# Altium PCB PressurePulse_Pulse-PCB.PcbDoc
Units mm, origin at the board's own origin, x right, y up, seen from the top; angles counter-clockwise.
Board outline 152.4 x 101.6 mm, 4 copper layers (Top Layer, Layer 1, Layer 2, Bottom Layer), stack 1.592 mm thick; 108 components, 77 nets, 384 pads, 27 vias.
Unrouted connection lines stored in the file: 225.
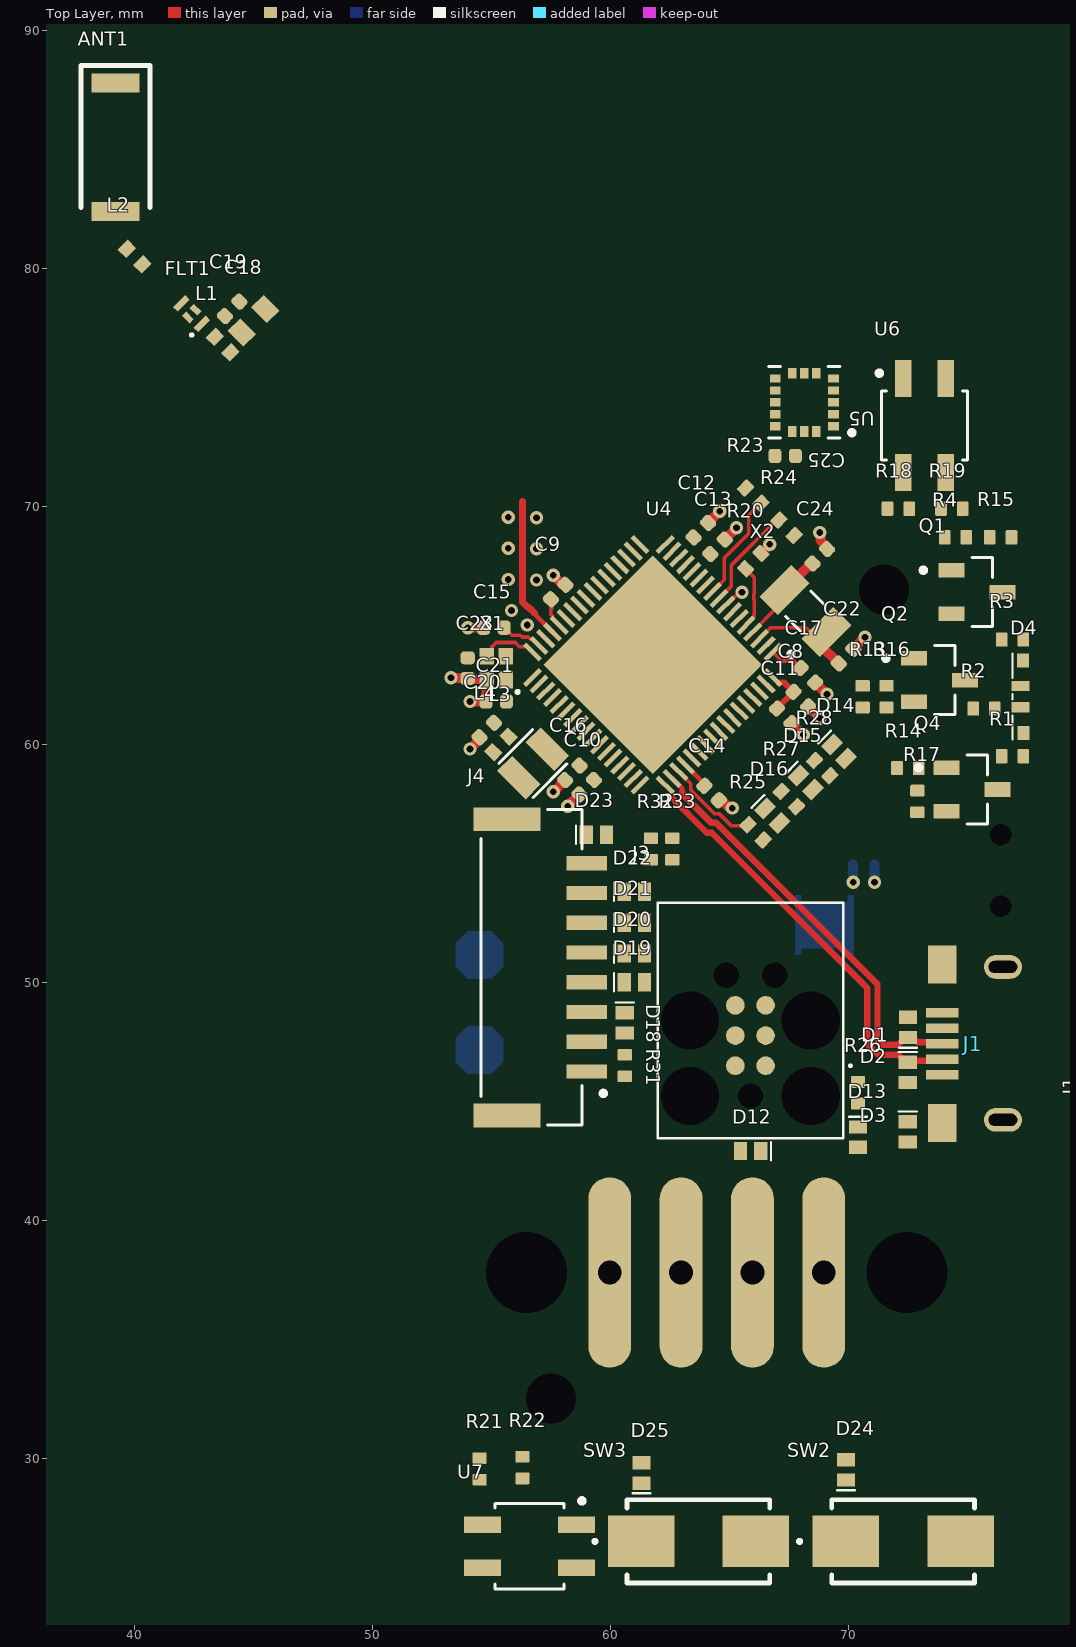
[diagram p0: Top Layer view]
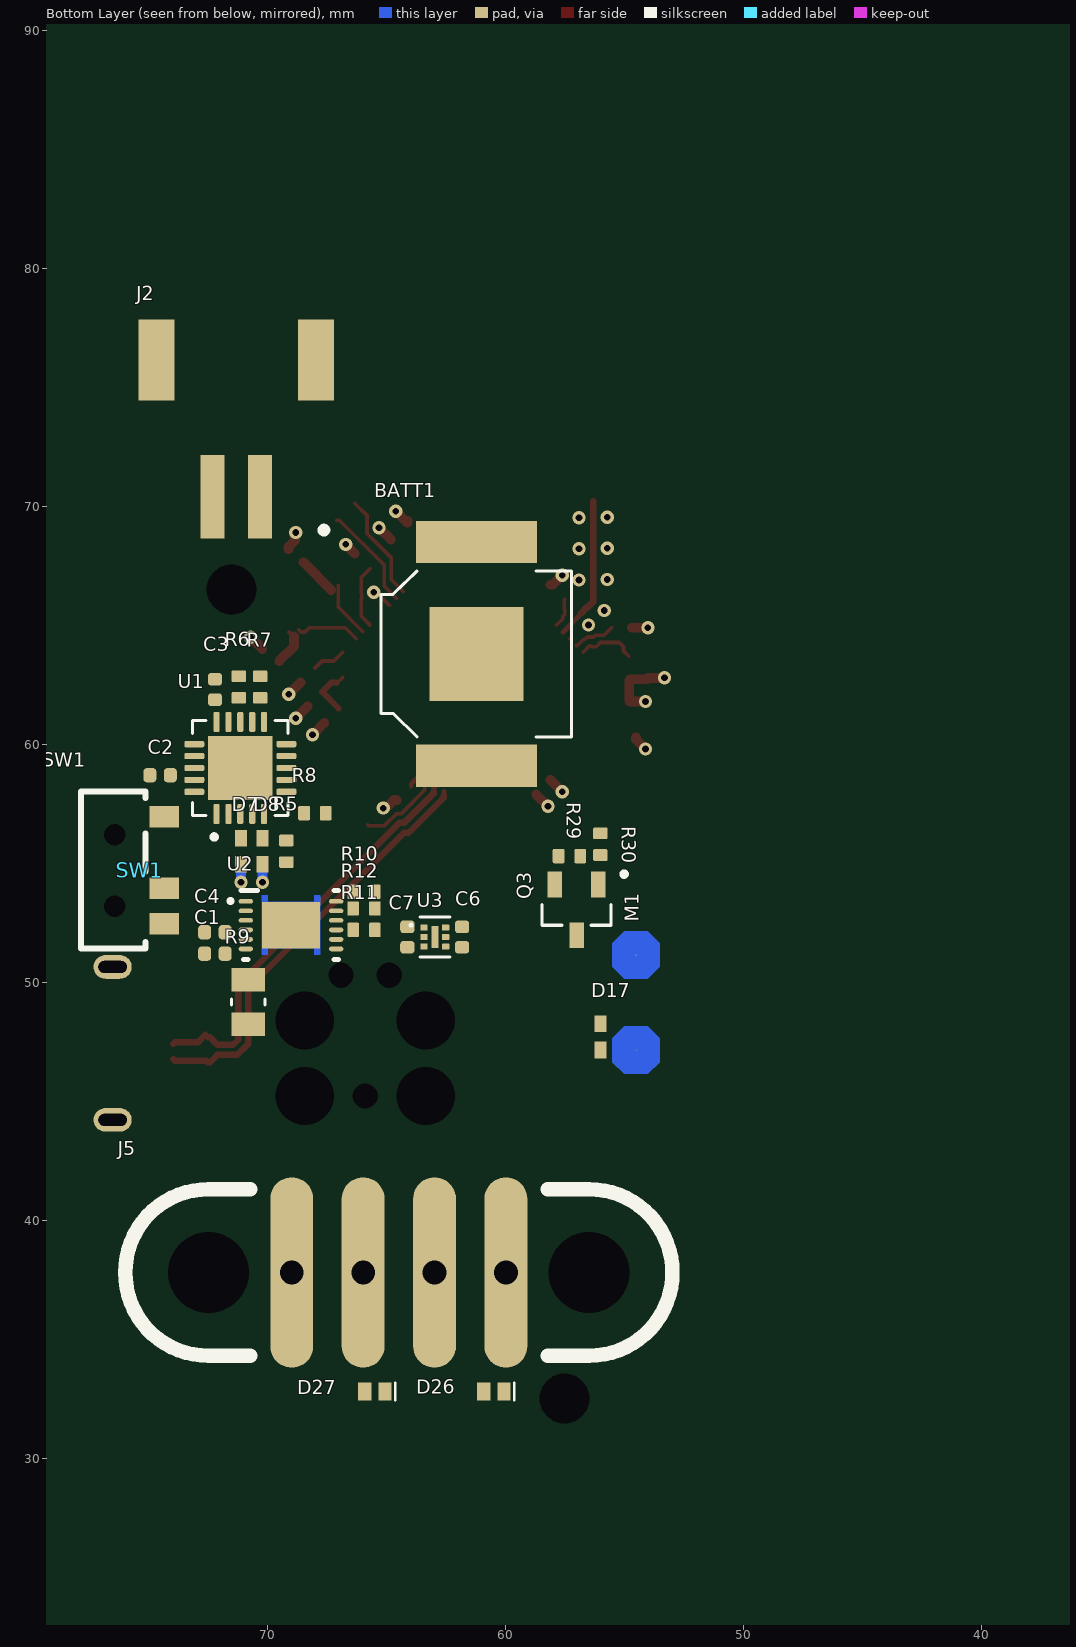
[diagram p1: Bottom Layer view, seen from below]

## Layer stack, top to bottom
Top Solder: solder mask 0.0102, Solder Resist, Dk 3.5
Top Layer: signal copper 0.0356
Dielectric 2: prepreg 0.2104, PP-006, Dk 4.4
Layer 1: signal copper 0.0175
Dielectric 1: dielectric 1.065, FR-4, Dk 4.6
Layer 2: signal copper 0.0175
Dielectric 3: prepreg 0.2104, PP-006, Dk 4.4
Bottom Layer: signal copper 0.0356
Bottom Solder: solder mask 0.0102, Solder Resist, Dk 3.5

## Board outline
0,0 152.4,0 152.4,101.6 0,101.6

## Design rules (kind name [scope] priority, off if disabled: settings)
Clearance "Power Plane - 1" [InNet('VDD') vs InNet('VBATT')] p1: gap=0.508 ignorepadtopadclearanceinfootprint=TRUE
Clearance "Power Plane - 2" [InNet('VDD') vs InNet('+5')] p2: gap=0.508 ignorepadtopadclearanceinfootprint=TRUE
Clearance [All] p3: gap=0.152 ignorepadtopadclearanceinfootprint=TRUE except(0: Arc-Hole Track-Hole SMDPad-Hole THPad-Hole Via-Hole Fill-Hole Poly-Hole Region-Hole Text-Hole)
DiffPairsRouting [InDifferentialPair('USB_D')] p1: maxlimit=0.152 minlimit=0.127 mostfreqgap=0.152 toplayer_mingap=0.152 toplayer_minwidth=0.203 toplayer_maxwidth=0.271 toplayer_prefwidth=0.271 midlayer1_maxgap=0.127 midlayer1_prefgap=0.127 midlayer1_minwidth=0.148 midlayer1_maxwidth=0.148 midlayer1_prefwidth=0.148 midlayer2_maxgap=0.127 midlayer2_prefgap=0.127 midlayer2_minwidth=0.148 midlayer2_maxwidth=0.148 midlayer2_prefwidth=0.148 bottomlayer_mingap=0.152 bottomlayer_minwidth=0.203 bottomlayer_maxwidth=0.271 bottomlayer_prefwidth=0.271 impedanceprofiledriven=TRUE impedanceprofileid={EF4C8564-DD1B-4EB1-A0A0-FBC0820FF4A4} impedanceprofilevalue=90.000000 maxuncoupledlength=12.7
Height [All] p1: minheight=0 maxheight=30 prefheight=12.7
HoleSize [All] p1: absolutevalues=TRUE maxlimit=3.5 minlimit=0.152 maxpercent=80.000 minpercent=20.000
MinimumSolderMaskSliver [All] p1: minsoldermaskwidth=0.025
PolygonConnect [All] p1: connectstyle=Direct reliefconductorwidth=0.254 reliefentries=4 polygonreliefangle="90 Angle" airgapwidth=0.254
RoomDefinition U_IR-Detector [InComponentClass('U_IR-Detector')] p1: confinementstyle=ConfineIn formatcopy=TRUE lockcomponents=FALSE outline 153.846,8.466 153.846,15.044 159.271,15.044 159.271,15.084 166.529,15.084 166.529,12.626 158.529,12.626 158.529,8.466
RoomDefinition U_MCU-BLE [InComponentClass('U_MCU-BLE')] p2: confinementstyle=ConfineIn formatcopy=TRUE lockcomponents=FALSE outline -25.4,-25.4 25.4,-25.4 25.4,0 -25.4,0
RoomDefinition U_USB-Charger-BMS [InComponentClass('U_USB-Charger-BMS')] p3: confinementstyle=ConfineIn formatcopy=TRUE lockcomponents=FALSE outline 85.367,63.575 85.367,65.233 86.847,65.233 86.847,69.188 88.067,69.188 88.067,70.933 93.34,70.933 93.34,71.235 102.252,71.235 102.252,61.193 103.615,61.193 103.615,53.485 97.107,53.485 97.107,61.323 93.34,61.323 93.34,61.575 86.967,61.575 86.967,62.95 86.847,62.95 86.847,63.575
RoomDefinition U_SWD [InComponentClass('U_SWD')] p4: confinementstyle=ConfineIn formatcopy=TRUE lockcomponents=FALSE outline 59.98,42.139 59.98,54.647 70.388,54.647 70.388,50.286 88.916,50.286 88.916,50.229 102.129,50.229 102.129,47.329 103.029,47.329 103.029,45.671 70.388,45.671 70.388,42.139
RoomDefinition U_USB [InComponentClass('U_USB')] p5: confinementstyle=ConfineIn formatcopy=TRUE lockcomponents=FALSE outline 71.81,42.7 71.81,49.232 72.967,49.232 72.967,51.901 79.2,51.901 79.2,42.935 73.182,42.935 73.182,42.7
RoomDefinition U_RF_T-Line [InComponentClass('U_RF_T-Line')] p6: confinementstyle=ConfineIn formatcopy=TRUE lockcomponents=FALSE outline 37.371,81.296 37.371,88.904 41.029,88.904 41.029,82.012 41.512,82.012 41.512,79.631 45.431,79.631 45.431,79.395 46.595,79.395 46.595,76.205 45.212,76.205 45.212,75.288 42.188,75.288 42.188,76.618 40.918,76.618 40.918,78.988 38.488,78.988 38.488,81.296
RoomDefinition U_Buttons [InComponentClass('U_Buttons')] p7: confinementstyle=ConfineIn formatcopy=TRUE lockcomponents=FALSE outline 153.446,1.414 153.446,2.786 159.916,2.786 159.916,1.414
RoomDefinition U_Fuel-Gauge [InComponentClass('U_Fuel-Gauge')] p8: confinementstyle=ConfineIn formatcopy=TRUE lockcomponents=FALSE outline 77.641,59.471 77.641,61.129 80.099,61.129 80.099,60.504 85.029,60.504 85.029,59.154 86.399,59.154 86.399,56.746 84.034,56.746 84.034,54.961 80.106,54.961 80.106,56.896 79.565,56.896 79.565,57.671 77.641,57.671 77.641,59.471
RoomDefinition U_LDO [InComponentClass('U_LDO')] p9: confinementstyle=ConfineIn formatcopy=TRUE lockcomponents=FALSE outline 94.646,75.841 94.646,78.099 95.386,78.099 95.386,78.129 97.899,78.129 97.899,78.099 98.454,78.099 98.454,75.841 97.899,75.841 97.899,75.811 95.386,75.811 95.386,75.841
RoomDefinition U_TFT-Display [InComponentClass('U_TFT-Display')] p10: confinementstyle=ConfineIn formatcopy=TRUE lockcomponents=FALSE outline 46.646,85.614 46.646,86.986 61.716,86.986 61.716,86.929 82.529,86.929 82.529,85.271 72.684,85.271 72.684,82.171 71.184,82.171 71.184,79.671 70.971,79.671 70.971,77.814 60.529,77.814 60.529,43.346 53.721,43.346 53.721,85.614
RoomDefinition U_UI-LEDs [InComponentClass('U_UI-LEDs')] p11: confinementstyle=ConfineIn formatcopy=TRUE lockcomponents=FALSE outline 93.526,127.621 93.526,130.079 104.626,130.079 104.626,130.179 138.334,130.179 138.334,128.521 126.834,128.521 126.834,128.171 122.099,128.171 122.099,120.821 113.684,120.821 113.684,117.171 106.926,117.171 106.926,123.421 100.027,123.421 100.027,127.621
RoomDefinition U_Gyroscope [InComponentClass('U_Gyroscope')] p12: confinementstyle=ConfineIn formatcopy=TRUE lockcomponents=FALSE outline 75.3,77.8 75.3,73.742 73.175,73.742 73.175,72.767 70.917,72.767 70.917,73.742 70.817,73.742 70.817,77.8
RoomDefinition U_Vibration-Motor [InComponentClass('U_Vibration-Motor')] p13: confinementstyle=ConfineIn formatcopy=TRUE lockcomponents=FALSE outline 23.246,44.891 23.246,53.399 54.546,53.399 54.546,55.189 55.171,55.189 55.171,57.274 56.829,57.274 56.829,56.374 58.729,56.374 58.729,55.189 58.979,55.189 58.979,50.901 57.154,50.901 57.154,46.296 55.804,46.296 55.804,44.891
RoomDefinition U_Magnetic-Charger [InComponentClass('U_Magnetic-Charger')] p14: confinementstyle=ConfineIn formatcopy=TRUE lockcomponents=FALSE outline 52.409,33.346 52.409,42.254 76.527,42.254 76.527,33.346 66.484,33.346 66.484,32.114 59.314,32.114 59.314,33.346
RoutingVias [All] p1: holewidth=0.279 width=0.559 viastyle="Through Hole" minholewidth=0.203 minwidth=0.406 maxholewidth=0.711 maxwidth=1.27
SilkToSolderMaskClearance [IsPad] p1: minsilkscreentomaskgap=0.061 clearancetoexposedcopper=TRUE
SolderMaskExpansion SolderMaskExpansion_1 [IsVia] p1: expansion=0.102 istentingtop=TRUE
SolderMaskExpansion [All] p2: expansion=0.102 istentingtop=FALSE
UnRoutedNet [All] p1: checkbadconnections=TRUE
Width RF_CPWG [InNetClass('RF')] p1: maxlimit=0.286 minlimit=0.175 preferedwidth=0.286 toplayer_minwidth=0.203 midlayer1_maxwidth=0.175 midlayer1_prefwidth=0.175 midlayer2_maxwidth=0.175 midlayer2_prefwidth=0.175 bottomlayer_minwidth=0.203 impedanceprofiledriven=TRUE impedanceprofileid={2461F056-BD51-4085-9126-9224849B1B2E} impedanceprofilevalue=50.000000 minimp=50.000000 maximp=50.000000 favimp=50.000000
Width [All] p2: maxlimit=1.524 minlimit=0.152 preferedwidth=0.914 toplayer_maxwidth=1.27 toplayer_prefwidth=0.406 bottomlayer_maxwidth=1.27 bottomlayer_prefwidth=0.406 minimp=50.000000 maximp=50.000000 favimp=50.000000
24 further rules are at their usual default settings.

## Classes and differential pairs
component class U_IR-Detector: R18 R19 R21 R22 U6 U7
component class U_UI-LEDs: D4 Q1 Q2 Q4 R1 R2 R3 R4 R13 R14 R15 R16 R17
component class U_RF_T-Line: ANT1 C18 C19 FLT1 L1 L2
net class USB: USB_D_N USB_D_P
net class RF: NetANT1_1 NetC18_2 NetC19_2 NetFLT1_3
component class U_Vibration-Motor: D17 M1 Q3 R29 R30
component class U_USB: D1 D2 D3 J1
component class U_USB-Charger-BMS: C2 C3 D7 D8 J2 R5 R6 R7 R8 SW1 U1
component class U_TFT-Display: D18 D19 D20 D21 D22 D23 J4 R31 R32 R33
component class U_SWD: D12 D13 D14 D15 D16 J3 R25 R26 R27 R28
component class U_MCU-BLE: BATT1 C8 C9 C10 C11 C12 C13 C14 C15 C16 C17 C20 C21 C22 C23 C24 L3 L4 R20 R23 R24 U4 X1 X2
component class U_Magnetic-Charger: D26 D27 J5
component class U_LDO: C6 C7 U3
component class U_Gyroscope: C25 U5
component class U_Fuel-Gauge: C1 C4 R9 R10 R11 R12 U2
component class U_Buttons: D24 D25 SW2 SW3
differential pair USB_D: +USB_D_P -USB_D_N

## Components (designator, comment, footprint, x,y, rotation, side; value= is the part's Value field where it differs from the comment)
ANT1 "CHIP ANTENNA" ANTC5220X130N 39.2,85.1 r90 top value=DNS
BATT1 "2998TR" SR66 61.2,63.8 r90 bottom value=DNS
C1 "CAP" 0402C 72.2,51.2 r180 bottom value=4.7uF
C2 "CAP" 0402C 74.5,58.7 r180 bottom value=10uF
C3 "CAP" 0402C 72.196,62.304 r270 bottom value=4.7u
C4 "CAP" 0402C 72.2,52.1 r180 bottom value=1uF
C6 "CAP" 0402C 61.81,51.9 r90 bottom value=4.7uF
C7 "CAP" 0402C 64.11,51.9 r90 bottom value=4.7uF
C8 "CAP" 0402C 68,61.9 r135 top value=4.7uF
C9 "CAP" 0402C 57.8,66.4 r225 top value=100nF
C10 "CAP" 0402C 59,58.2 r45 top value=100nF
C11 "CAP" 0402C 67.3,61.2 r135 top value=100nF
C12 "CAP" 0402C 63.8,69 r225 top value=1uF
C13 "CAP" 0402C 64.5,68.3 r225 top value=1uF
C14 "CAP" 0402C 64.25,57.95 r135 top value=100nF
C15 "CAP" 0402C 55.1,64.9 r0 top value=100nF
C16 "CAP" 0402C 58.4,58.8 r45 top value=4.7uF
C17 "CAP" 0402C 68.3,62.9 r135 top value=100nF
C18 "CAP" 0603C 45,77.8 r225 top value=0.8pF
C19 "CAP" 0402C 44.1,78.3 r225 top value=0.3pF
C20 "CAP" 0402C 54.8,60.6 r45 top value=4.7uF
C21 "CAP" 0402C 55.2,61.8 r180 top value=DNS
C22 "CAP" 0402C 69.9,63.7 r45 top value=10pF
C23 "CAP" 0402C 54,63.2 r270 top value=DNS
C24 "CAP" 0402C 68.8,67.9 r45 top value=10pF
C25 "CAP" 0402C 67.346,72.121 r0 top value=4.7uF
D1 "RCLAMP0521P.TCT" BDFN2C051V40 72.5,48.1 r90 top value=BDFN2C051V40
D2 "RCLAMP0521P.TCT" BDFN2C051V40 72.496,46.216 r270 top value=BDFN2C051V40
D3 "RCLAMP0521P.TCT" BDFN2C051V40 72.496,43.716 r270 top value=BDFN2C051V40
D4 "LED - RGB, SIDE MOUNT" FM-3510RGBA-SG 77.3,62 r90 top value=FM-3510RGBA-SG
D7 "490mV @ 500mA" SOD-523 71.096,55.504 r270 bottom value=MSK4005
D8 "490mV @ 500mA" SOD-523 70.196,55.504 r270 bottom value=MSK4005
D12 "RCLAMP0521P.TCT" BDFN2C051V40 65.9,42.9 r180 top value=BDFN2C051V40
D13 "RCLAMP0521P.TCT" BDFN2C051V40 70.4,43.5 r270 top value=BDFN2C051V40
D14 "RCLAMP0521P.TCT" BDFN2C051V40 69.6,59.7 r315 top value=BDFN2C051V40
D15 "RCLAMP0521P.TCT" BDFN2C051V40 68.2,58.4 r315 top value=BDFN2C051V40
D16 "RCLAMP0521P.TCT" BDFN2C051V40 66.8,57 r315 top value=BDFN2C051V40
D17 "490mV @ 500mA" SOD-523 56,47.7 r90 bottom value=MSK4005
D18 "BDFN2C051V40" BDFN2C051V40 60.6,48.3 r270 top
D19 "BDFN2C051V40" BDFN2C051V40 61,50 r0 top
D20 "BDFN2C051V40" BDFN2C051V40 61,51.2 r0 top
D21 "BDFN2C051V40" BDFN2C051V40 61,52.5 r0 top
D22 "BDFN2C051V40" BDFN2C051V40 61,53.8 r0 top
D23 "BDFN2C051V40" BDFN2C051V40 59.4,56.2 r0 top
D24 "BDFN2C051V40" BDFN2C051V40 69.9,29.5 r90 top
D25 "BDFN2C051V40" BDFN2C051V40 61.3,29.368 r90 top
D26 "RCLAMP0521P.TCT" BDFN2C051V40 60.468,32.8 r0 bottom value=BDFN2C051V40
D27 "RCLAMP0521P.TCT" BDFN2C051V40 65.468,32.8 r0 bottom value=BDFN2C051V40
FLT1 "DLF162500LT-5028A1" DLF-4_1P6X0P8 42.4,78.1 r135 top
J1 "UJ2-MIBH2-4-SMT-TR" "USB MICRO JLC" 73.946,47.418 r90 top value=UA0507065250-037-06
J2 "S2B-PH-SM4-TB" JST_PH-2POS-SMT-RA 71.3,73.275 r0 bottom value=S2B-PH-SM4-TB(TF)(SN)
J3 "2030-IDC" "TAG CONNECT TC2030IDC - NO 3D MODEL" 65.884,47.443 r90 top value=DNS
J4 "BM08B-GHS-TBT(LF)(SN)" JST_BM08B-GHS-TBT(LF)(SN)(N) 59,50.625 r270 top
J5 "303C-xxxxxx-30-04" "MAG POGO - 4 POS MALE" 64.468,37.8 r180 bottom value=DNS
L1 "IND" 0402L 43.7,76.8 r135 top value=2.7nH
L2 "IND" 0402L 40,80.5 r315 top
L3 "IND" 0805L 56.75,59.2 r45 top value=10uH
L4 "IND" 0402L 55.4,60 r225 top value=10nH
M1 "VIBRATION MOTOR" "BARE PADS - 2" 55.5,49.145 r0 bottom value=LCM0827A3038F
Q1 "NMOS" SOT-23 75.4,66.4 r0 top value=IRLML0100TRPBF
Q2 "NMOS" SOT-23 73.83,62.7 r0 top value=IRLML0100TRPBF
Q3 "NMOS" SOT-23 57,53.045 r270 bottom value=IRLML0100TRPBF
Q4 "NMOS" SOT-23 75.2,58.1 r0 top value=IRLML0100TRPBF
R1 "RES" 0402R 76.9,59.5 r0 top value=30
R2 "RES" 0402R 75.7,61.5 r0 top value=30
R3 "RES" 0402R 76.9,64.4 r0 top value=60
R4 "RES" 0402R 74.5,68.7 r180 top value=47
R5 "RES" 0402R 69.196,55.504 r90 bottom value=10k
R6 "RES" 0402R 71.196,62.404 r270 bottom value=2.5k
R7 "RES" 0402R 70.296,62.404 r270 bottom value=22k
R8 "RES" 0402R 67.996,57.104 r0 bottom value=15k
R9 "RES" 0805R 70.8,49.165 r270 bottom value=10m
R10 "RES" 0402R 65.93,53.8 r180 bottom value=10k
R11 "RES" 0402R 65.93,52.2 r180 bottom value=DNS
R12 "RES" 0402R 65.93,53.1 r0 bottom value=10k
R13 "RES" 0402R 70.6,62 r270 top value=47
R14 "RES" 0402R 72.5,59 r180 top value=47
R15 "RES" 0402R 76.4,68.7 r180 top value=10k
R16 "RES" 0402R 71.6,62 r90 top value=10k
R17 "RES" 0402R 72.9,57.6 r90 top value=10k
R18 "RES" 0402R 72.1,69.9 r180 top value=100
R19 "RES" 0402R 74.345,69.9 r0 top value=10k
R20 "RES" 0402R 66,67.7 r225 top value=10k
R21 "RES" 0402R 54.5,29.545 r90 top value=100
R22 "RES" 0402R 56.3,29.6 r90 top value=10k
R23 "RES" 0402R 66,70.45 r135 top value=4.7k
R24 "RES" 0402R 67.4,69.1 r315 top value=4.7k
R25 "RES" 0402R 66.1,56.3 r135 top value=47
R26 "RES" 0402R 70.4,45.355 r90 top value=47
R27 "RES" 0402R 67.5,57.7 r135 top value=47
R28 "RES" 0402R 68.9,59 r135 top value=47
R29 "RES" 0402R 57.3,55.3 r0 bottom value=47
R30 "RES" 0402R 56,55.8 r90 bottom value=10k
R31 "RES" 0402R 60.6,46.5 r270 top value=10k
R32 "RES" 0402R 61.7,55.6 r90 top value=10k
R33 "RES" 0402R 62.6,55.6 r90 top value=47
SW1 "SPDT SLIDE SWITCH - RA" K3-1290S-J1 74.325,56.95 r270 bottom value=K3-1290S-J1
SW2 "SPST SMT Tactile Push Button Switch" TL3302BF180QJ 72.3,26.5 r270 top value=TL3302BF180QJ
SW3 "SPST SMT Tactile Push Button Switch" TL3302BF180QJ 63.7,26.5 r270 top value=TL3302BF180QJ
U1 "MCP73871T-2CCI/ML" "20-VFQFN EXPOSED PAD" 71.131,59.004 r90 bottom
U2 "BQ27441DRZR-G1A" bq27441-G1 69,52.4 r180 bottom
U3 "NCP176AMX330TCG" 6-XDFN 62.955,51.9 r180 bottom
U4 "STM32WB55RGV6" VQFN-68 61.773,63.341 r225 top
U5 "GYROSCOPE" 16-VFLGA 68.146,74.371 r180 top value=LIS3DHTR
U6 "QRE1113GR" SMD-4P 73.2,73.4 r0 top
U7 "QRE1113GR" SMD-4P 56.6,26.3 r270 top
X1 "XTAL-OSC_32MHz" 32MHZ_SMD1612-4P 55.2,63.2 r180 top value=XRCMD32M000FXP50R0
X2 "XTAL-OSC_32.768kHz" XTAL_ECS-.327-12.5-34B-TR 68.2,65.6 r315 top value=CM315D32768DZFT

## Footprints (in the part's own frame and the unit in brackets; to place one, negate y for a bottom-side part, rotate by r counter-clockwise, add the part's x,y. Pads: shape width x height; smd on the part's side, far side on the other; paste and mask are expansions set on the pad)
6-XDFN [mm]
  rrect25% 0.31x0.25 smd mask+0.038: 1(-0.455,0.4) 2(-0.455,0) 3(-0.455,-0.4) 4(0.455,-0.4) 5(0.455,0) 6(0.455,0.4)
  rect 0.3x0.94 smd paste-1 mask+0.038: 7(0,0)
  silkscreen extent -1.05,-0.84 0.63,0.84, body extent -0.6,-0.6 0.6,0.6, height 0.45
16-VFLGA [mm]
  rect 0.45x0.35 smd paste-1 mask+0.02: 1(-1.225,1) 2(-1.225,0.5) 3(-1.225,0) 4(-1.225,-0.5) 5(-1.225,-1) 9(1.225,-1) 10(1.225,-0.5) 11(1.225,0) 12(1.225,0.5) 13(1.225,1)
  rect 0.35x0.45 smd paste-1 mask+0.02: 6(-0.5,-1.225) 7(0,-1.225) 8(0.5,-1.225) 14(0.5,1.225) 15(0,1.225) 16(-0.5,1.225)
  silkscreen extent -2.1,-1.5 1.5,1.5, body extent -1.5,-1.5 1.5,1.5, height 1
"20-VFQFN EXPOSED PAD" [mm]
  rrect50% 0.84x0.26 smd mask+0.051: 1(-1.935,1) 2(-1.935,0.5) 3(-1.935,0) 4(-1.935,-0.5) 5(-1.935,-1) 11(1.935,-1) 12(1.935,-0.5) 13(1.935,0) 14(1.935,0.5) 15(1.935,1)
  rrect50% 0.26x0.84 smd mask+0.051: 6(-1,-1.935) 7(-0.5,-1.935) 8(0,-1.935) 9(0.5,-1.935) 10(1,-1.935) 16(1,1.935) 17(0.5,1.935) 18(0,1.935) 19(-0.5,1.935) 20(-1,1.935)
  rect 2.7x2.7 smd paste-2 mask+0.051: 21(0,0)
  silkscreen extent -3,-2 2,2, body extent -2,-2 2,2, height 1
32MHZ_SMD1612-4P [mm]
  rect 0.6x0.7 smd mask+0.025: 1(-0.4,0.5) 3(0.4,-0.5) FLOAT(-0.4,-0.5) GND(0.4,0.5)
  silkscreen extent -0.95,0.95 -0.85,1.05, body extent -0.6,-0.8 0.6,0.8, height 0.35
0402C [mm] "0402 SMT Capacitor"
  rrect53% 0.54x0.6 smd: 1(-0.43,0) 2(0.43,0)
  body extent -0.5,-0.25 0.5,0.25, height 0.5
0402L [mm]
  rect 0.51x0.6 smd: 1(-0.46,0) 2(0.46,0)
  body extent -0.5,-0.3 0.5,0.3, height 0.6
0402R [mm] "0402 SMT Resistor"
  rrect20% 0.49x0.6 smd: 1(-0.455,0) 2(0.455,0)
  body extent -0.75,-0.25 0.75,0.25, height 0.35
0603C [mm]
  rect 0.75x0.94 smd: 1(-0.7,0) 2(0.7,0)
  body extent -0.8,-0.4 0.8,0.4, height 0.9
0805L [mm]
  rect 0.9x1.7 smd: 1(-0.85,0) 2(0.85,0)
  silkscreen extent -1.02,-1.02 0.98,1.02, body extent -1,-0.78 1,0.82, height 1.08
0805R [mm]
  rect 1x1.42 smd: 1(-0.935,0) 2(0.935,0)
  silkscreen extent -0.12,-0.7 0.12,0.7, body extent -1,-0.63 1,0.63, height 0.6
ANTC5220X130N [mm]
  rect 0.8x2 smd: 1(-2.7,0) 2(2.7,0)
  silkscreen extent -2.55,-1.45 3.42,1.45, body extent -2.6,-1 2.6,1, height 1.3
"BARE PADS - 2" [mm]
  round 0.025 smd mask+0.05: 1(-1,2) 2(-1,-2)
  Top Layer region: -1.5,1 -2,1.5 -2,2.5 -1.5,3 -0.5,3 0,2.5 0,1.5 -0.5,1
  Top Layer region: -1.5,-3 -2,-2.5 -2,-1.5 -1.5,-1 -0.5,-1 0,-1.5 0,-2.5 -0.5,-3
  body extent -32,-4 -0.47,4, height 3.13
BDFN2C051V40 [mil]
  rect 22x30 smd paste+0 mask+2: A(17,0) K(-16.5,0)
  silkscreen extent -33,-15 -33,15, body extent -21,-14 21,14, height 22
bq27441-G1 [mm]
  oval 0.6x0.2 smd paste+0 mask+0.051: 1(-1.9,1) 2(-1.9,0.6) 3(-1.9,0.2) 4(-1.9,-0.2) 5(-1.9,-0.6) 6(-1.9,-1) 7(1.9,-1) 8(1.9,-0.6) 9(1.9,-0.2) 10(1.9,0.2) 11(1.9,0.6) 12(1.9,1)
  rect 2.45x1.95 smd paste-0.975 mask+0.051: 13(0,0)
  Top Layer region: -0.975,-1.25 -1.225,-1.25 -1.225,1.25 -0.975,1.25 -0.975,0.975 0.975,0.975 0.975,1.25 1.225,1.25 1.225,-1.25 0.975,-1.25 0.975,-0.975 -0.975,-0.975
  silkscreen extent -2.58,-1.45 2,1.45, body extent -2.05,-1.25 2.05,1.25, height 0.95
DLF-4_1P6X0P8 [mil]
  rect 11x28 smd paste+0 mask+1.57: 1(-24,0) 3(24,0)
  rect 18x10 smd paste+0 mask+1.57: 2(0,9) 4(0,-9)
  silkscreen extent -27,23 -23,27, body extent -33,-16 33,16, height 10
FM-3510RGBA-SG [mm]
  rect 0.44x0.75 smd mask+0.05: +(0.45,0.063) G(-0.45,0.063)
  rect 0.6x0.5 smd mask+0.05: B(-1.525,-0.062) R(1.525,-0.038)
  silkscreen extent -1.8,0.4 1.8,0.4, body extent -1.8,-0.5 1.8,0.5, height 1
JST_BM08B-GHS-TBT(LF)(SN)(N) [mm]
  rect 0.6x1.7 smd: 1(4.375,0) 2(3.125,0) 3(1.875,0) 4(0.625,0) 5(-0.625,0) 6(-1.875,0) 7(-3.125,0) 8(-4.375,0)
  rect 1x2.8 smd: SHIELD(-6.225,-3.35) SHIELD(6.225,-3.35)
  silkscreen extent -6.63,-4.45 6.63,0.8, body extent -6.63,-4.5 6.63,0.45, height 4.28
JST_PH-2POS-SMT-RA [mm]
  rect 1x3.5 smd: 1(-1,2.875) 2(1,2.875)
  rect 1.5x3.4 smd: P1(-3.35,-2.875) P2(3.35,-2.875)
  silkscreen extent -3.81,4.15 -3.56,4.4, body extent -3.95,-4.38 3.95,4.23, height 5.5
K3-1290S-J1 [mm]
  rect 0.9x1.25 smd: 1(0,0) 2(3,0) 3(4.5,0)
  rect 0.2x0.2 hole 0.9 unplated: H(0.75,-2.075) H(3.75,-2.075)
  silkscreen extent -1.07,-3.5 5.53,-0.8, body extent -1.39,-5.14 5.81,0.86, height 2.82
"MAG POGO - 4 POS MALE" [mm]
  oval 1.8x8 hole 1 paste+0.2: 1(-4.5,0) 2(-1.5,0) 3(1.5,0) 4(4.5,0)
  round 0 hole 3.4 unplated: 9(-8,0) 9(8,0)
  silkscreen extent -11.5,-3.5 11.5,3.5, body extent -10.75,-3 11.25,2.89, height 3.52
SMD-4P [mm]
  rect 0.69x1.57 smd: 1(-0.9,1.975) 2(-0.9,-1.975) 3(0.9,-1.975) 4(0.9,1.975)
  silkscreen extent -2,-1.45 1.8,2.3, body extent -1.7,-2.3 1.7,2.3, height 1.87
SOD-523 [mm]
  rect 0.7x0.5 smd mask+0.05: A(0.55,0) K(-0.55,0)
  body extent -0.8,-0.4 0.8,0.4, height 0.65
SOT-23 [mm]
  rect 1.09x0.61 smd: D(1.07,0) G(-1.07,0.915) S(-1.07,-0.915)
  silkscreen extent -2.35,-1.45 0.65,1.45, body extent -1.2,-1.45 1.2,1.45, height 1.2
SR66 [mm]
  rect 3.96x3.96 smd paste-3: N(0,0)
  rect 1.78x5.08 smd: P(-4.7,0) P(4.7,0)
  silkscreen extent -3.49,-3.98 3.49,4.02, body extent -5.36,-3.99 5.36,4.01, height 3.15
"TAG CONNECT TC2030IDC - NO 3D MODEL" [mil]
  round 30.83 smd: 1(-37.52,-25) 2(-37.52,25) 3(12.48,-25) 4(12.48,25) 5(62.52,-25) 6(62.52,25)
  round 48.25 hole 96.5 unplated: 7(-87.52,-100) 9(-87.52,100) 10(37.48,-100) 11(37.48,100)
  round 21 hole 42.01 unplated: 8(-87.52,0) 12(112.48,-40) 13(112.48,40)
  silkscreen extent -157,-167 232,154
TL3302BF180QJ [mm]
  rect 2.16x2.795 smd: 1(0,-2.413) 2(0,2.413)
  silkscreen extent -1.75,-4.4 1.75,3, body extent -1.75,-3.49 1.75,3.49, height 5
"USB MICRO JLC" [mm] "UA0507065250-037-06"
  rect 0.4x1.35 smd mask+0.05: 1(-1.3,0) 2(-0.65,0) 3(0,0) 4(0.65,0) 5(1.3,0)
  rect 1.6x1.2 smd: SH1(3.327,0) SH2(-3.327,0)
  oval 1x1.6 hole 0.5 slot 1.2 at 90 deg: SH3(-3.202,-2.55) SH4(3.225,-2.55)
  body extent -4,-5 4,0.4, height 2.75
VQFN-68 [mm]
  rect 0.95x0.2 smd mask+0.038: 1(-3.95,3.2) 2(-3.95,2.8) 3(-3.95,2.4) 4(-3.95,2) 5(-3.95,1.6) 6(-3.95,1.2) 7(-3.95,0.8) 8(-3.95,0.4) 9(-3.95,0) 10(-3.95,-0.4) 11(-3.95,-0.8) 12(-3.95,-1.2) 13(-3.95,-1.6) 14(-3.95,-2) 15(-3.95,-2.4) 16(-3.95,-2.8) 17(-3.95,-3.2) 35(3.95,-3.2) 36(3.95,-2.8) 37(3.95,-2.4) 38(3.95,-2) 39(3.95,-1.6) 40(3.95,-1.2) 41(3.95,-0.8) 42(3.95,-0.4) 43(3.95,0) 44(3.95,0.4) 45(3.95,0.8) 46(3.95,1.2) 47(3.95,1.6) 48(3.95,2) 49(3.95,2.4) 50(3.95,2.8) 51(3.95,3.2)
  rect 0.2x0.95 smd mask+0.038: 18(-3.2,-3.95) 19(-2.8,-3.95) 20(-2.4,-3.95) 21(-2,-3.95) 22(-1.6,-3.95) 23(-1.2,-3.95) 24(-0.8,-3.95) 25(-0.4,-3.95) 26(0,-3.95) 27(0.4,-3.95) 28(0.8,-3.95) 29(1.2,-3.95) 30(1.6,-3.95) 31(2,-3.95) 32(2.4,-3.95) 33(2.8,-3.95) 34(3.2,-3.95) 52(3.2,3.95) 53(2.8,3.95) 54(2.4,3.95) 55(2,3.95) 56(1.6,3.95) 57(1.2,3.95) 58(0.8,3.95) 59(0.4,3.95) 60(0,3.95) 61(-0.4,3.95) 62(-0.8,3.95) 63(-1.2,3.95) 64(-1.6,3.95) 65(-2,3.95) 66(-2.4,3.95) 67(-2.8,3.95) 68(-3.2,3.95)
  rect 6.5x6.5 smd mask+0.038: 69(0,0)
  silkscreen extent -4.52,3.7 -4.33,3.9, body extent -4.05,-4.04 4.05,4.06, height 1
XTAL_ECS-.327-12.5-34B-TR [mm]
  rect 1.1x1.9 smd: 1(-1.25,0) 2(1.25,0)
  silkscreen extent -0.44,-0.75 0.44,0.75, body extent -1.6,-0.75 1.6,0.75, height 0.9

## Part data
ANT1: Center Frequency="2.45 GHz", MFR="Pulse Electronics", MFR PN=ANT7020LL05R2400A
BATT1: library part "COIN CELL BATT - SR66", "Battery Holder (Open) Coin, 6.8mm, 1 Cell PC Pin", JLCPCB PN=DNS, MFR="Keystone Electronics", MFR PN=2998TR
C1 C2 C3 C4 C6 C7 C25: "Capacitor"
C8 C9 C10 C11 C12 C13 C14 C15 C16 C17 C20 C21 C23: "Capaicitor"
C18: "Capacitor", JLCPCB PN=C907996
C19: "Capacitor", JLCPCB PN=C2986289
C22 C24: "Capaicitor", JLCPCB PN=C328913, MFR PN=FN15N100J500PNG
D1 D2 D3 D12 D13 D14 D15 D16 D26 D27: library part "TVS DIODE", "25V Clamp 4A (8/20µs) Ipp Tvs Diode Surface Mount SLP1006P2", JLCPCB PN=C152023, MFR=BORN, MFR PN=BDFN2C051V40, Type=SMD
D4: JLCPCB PN=C727903, MFR="Foshan NationStar Optoelectronics", MFR PN=FM-3510RGBA-SG
D7 D8 D17: library part "SCHOTTKY DIODE", JLCPCB PN=C345957, MFR=Shikues, MFR PN=MSK4005
D18 D19 D20 D21 D22 D23 D24 D25: library part "TVS DIODE", "25V Clamp 4A (8/20µs) Ipp Tvs Diode Surface Mount SLP1006P2", JLCPCB PN=C152023, MFR=BORN, MFR PN=BDFN2C051V40, Type=SMD
FLT1: library part "2.45GHz LPF", "RF FILTER LOW PASS 2.45GHZ 0603", JLCPCB PN=C531364, MFR=TDK, MFR PN=DLF162500LT-5028A1
J1: library part "Micro USB Port", "Micro B, USB 2.0, 1.8 A, Right Angle, Surface Mount (SMT), USB Receptacle", JLCPCB PN=C5249562, MFR="CUI Devices"
J2: library part "JST CONN 2POS PH", "Connector Header Surface Mount, Right Angle 2 position 0.079 (2.00mm)", MFR="JST Sales", MFR PN=S2B-PH-SM4-TB(TF)(SN), Type=SMD
J3: library part "TAG CONNECT 2030-IDC", "TAG CONNECT 2030-IDC", MFR="Tag Connect", MFR PN=TC2030-IDC
J4: library part "JST CONN 8POS GH", "Connector Header Surface Mount 8 position 0.049 _1.25mm_", JLCPCB PN=C133062, MFR="JST Sales", MFR PN=BM08B-GHS-TBT(LF)(SN)
J5: "MAGNETIC POGO 4POS", MFR="ATTEND Technology", MFR PN=303C-321018-30-04
L1: "INDUCTOR", JLCPCB PN=C963981
L2 L3: "INDUCTOR"
L4: "INDUCTOR", JLCPCB PN=C963995
M1: "9000rpm Coin Type Vibration Motor 3V -  Vibration Motor ROHS", JLCPCB PN=C2759981, MFR=LEADER, MFR PN=LCM0827A3038F
Q1 Q2 Q3 Q4: "100V 1.6A 1.3W 220mΩ@10V,1.6A N Channel SOT-23  MOSFETs ROHS", JLCPCB PN=C53658, MFR=Infineon, MFR PN=IRLML0100TRPBF
R1 R2 R3 R4 R5 R6 R7 R8 R11 R13 R14 R15 R16 R17 R18 R19 R20 R21 R22 R23 R24 R25 R26 R27 R28 R29 R30 R31 R32 R33: "Resistor"
R9: "Resistor", JLCPCB PN=C510282, MFR="ROHM Semicon", MFR PN=PMR10EZPFU10L0, Tolerance=1%
R10 R12: "Resistor", JLCPCB PN=C843837
SW1: JLCPCB PN=C223846, MFR="Korean Hroparts Elec", MFR PN=K3-1290S-J1, Type=SMD
SW2 SW3: JLCPCB PN=C2886917, MFR=E-Switch, MFR PN=TL3302BF180QJ
U1: library part "LiPo Batt Charger - Shared load", "Charger IC Lithium Ion/Polymer 20-QFN (4x4)", JLCPCB PN=C511310, MFR="Microchip Technology", MFR PN=MCP73871T-2CCI/ML
U2: library part "BATT FUEL GAUGE", "No Description Available", JLCPCB PN=C473397, MFR="Texas Instruments", MFR PN=BQ27441DRZR-G1A
U3: library part "LDO 3.3V", "LDO REGULATOR", JLCPCB PN=C233363, MFR=onsemi, MFR PN=NCP176AMX330TCG
U4: "ARM Microcontrollers - MCU Ultra-low-power dual core Arm Cortex-M4 MCU 64 MHz, Cortex-M0 32MHz with 1 Mbyte Flash, BLE, 802.15.4, USB, LCD, AES-256", JLCPCB PN=C401505, MFR=STMicroelectronics
U5: "Accelerometer X, Y, Z Axis Â±2g, 4g, 8g, 16g 0.5Hz ~ 625Hz 16-LGA (3x3)", JLCPCB PN=C15134, MFR=STMicroelectronics, MFR PN=LIS3DHTR
U6 U7: library part "IR DETECTOR", "Reflective Optical Sensor 0.039 (1mm) 4-SMD, Gull Wing", JLCPCB PN=C232862, MFR="ON Semiconductor", MFR PN=QRE1113GR
X1: "SMD Tuning Fork Crystal", Frequency="32 MHz", JLCPCB PN=C341820, MFR PN=Murata, Type=SMD
X2: "32.768kHz 12.5pF ±20ppm SMD3215-2P  Crystals ROHS", Frequency="32.768 KHz", JLCPCB PN=C182057, MFR=CITIZEN, MFR PN=CM315D32768DZFT

## Free pads (board coordinates)
  oval 0.7x0.6 hole 2.1 unplated: MH1(71.5,66.5) MH2(57.5,32.5)

## Via types
v1: diameter 0.559, hole 0.279, Top Layer to Bottom Layer, tented both sides, 27 vias

## Nets (pads, with @x,y where several pads share a name; then routed paths per layer and width w, separated by ;. In a path a pad name is that pad's centre, name@x,y a point inside that pad or via, vN(x,y) a via of type N, cw(c..) or ccw(c..) an arc to the next point about the centre after c; other vN are vias at no path point)
+5V: C2.2 D3.K D26.K J1.1 J5.1 U1.2 U1.18 U1.19
BATT_DETECT: R11.1 R12.2 U2.10
GAUGE_IO: R10.1 U2.12
GND: BATT1.N C1.1 C2.1 C3.1 C4.1 C6.1 C7.1 C8.1 C9.1 C10.1 C11.1 C12.1 C13.1 C14.1 C15.1 C16.1 C17.1 C18.1 C19.1 C20.1 C21.2 C22.2 C23.2 C24.2 C25.1 D1.A D2.A D3.A D12.A D13.A D14.A D15.A D16.A D18.A D19.A D20.A D21.A D22.A D23.A D24.A D25.A D26.A D27.A FLT1.2 FLT1.4 J1.5 J2.2 J3.5 J4.2 J4.SHIELD J5.4 Q1.S Q2.S Q3.S Q4.S R5.1 R6.1 R7.1 R8.1 R12.1 R15.1 R16.1 R17.1 R20.1 R30.2 SW2.2 SW3.2 U1.3 U1.10 U1.11 U1.21 U2.3 U2.13 U3.3 U3.7 U4.32 U4.42 U4.69 U5.5 U5.10 U5.12 U6.1 U6.4 U7.1 U7.4 X1.GND | length 12.9
  Top Layer w0.406: v1(53.3,62.8) 53.315,62.785 53.985,62.785 C23.2 54.035,62.735 54.735,62.735 54.785,62.685 54.785,61.815 C21.2 v1(54.1,61.8) ; v1(54,64.9) C15.1 ; v1(54.1,59.8) 54.499,60.199 54.499,60.293 C20.1 ; v1(57.6,58) C16.1 ; v1(57.6,67.1) 57.614,67.1 58.01,66.704 C9.1 ; v1(58.2,57.4) C10.1 ; C12.1 64.101,69.307 64.101,69.401 64.151,69.351 v1(64.6,69.8) ; C14.1 64.575,57.667 64.67,57.667 64.989,57.348 65.09,57.348 v1(65.119,57.319) ; C13.1 v1(65.3,69.1) ; R20.1 v1(66.7,68.4) ; C11.1 v1(68.1,60.4) ; C8.1 v1(68.8,61.1) ; C17.1 v1(69.1,62.1) ; v1(68.8,68.9) 68.829,68.871 68.829,68.573 69.104,68.299 C24.2 ; C22.2 v1(70.7,64.5)
  other v1: 56.5,65.015 55.84,65.623 56.895,66.907 55.705,66.925 55.705,68.233 56.895,68.215 56.895,69.524 55.705,69.542
HSE_IN: C21.1 U4.35 X1.1
HSE_OUT: C23.1 U4.34 X1.3 | length 2.5
  Top Layer w0.152: X1.3 55.024,63.924 55.024,64.097 55.205,64.279 55.995,64.279 56.173,64.1 56.381,64.1 56.418,64.137 56.452,64.137 U4.34
LSE_IN: C22.1 U4.3 X2.2 | length 4.2
  Top Layer w0.152: U4.3 66.725,64.9 68.234,64.9 68.416,64.718 68.586,64.718 X2.2@68.675,64.807 ; X2.2@68.975,64.607 X2.2
  Top Layer w0.406: X2.2@68.875,64.533 68.875,64.117 C22.1@69.496,63.496
LSE_OUT: C24.1 U4.4 X2.1 | length 4
  Top Layer w0.152: U4.4@65.98,64.731 67.016,65.767 X2.1@67.016,66.684
  Top Layer w0.406: X2.1 C24.1@68.484,67.652
NetANT1_1: ANT1.1 L2.2
NetC1_2: C1.2 R9.1 SW1.2 U2.6 U2.8
NetC4_2: C4.2 U2.5
NetC6_2: C6.2 R9.2 U2.7 U3.4 U3.6
NetC18_2: C18.2 L1.1 U4.31 | length 6
  Top Layer w0.203: 56.821,65.507 56.8,65.485 U4.31
  Top Layer w0.286: 56.3,70.2 56.3,65.985 56.539,65.746 56.582,65.746 56.821,65.507
NetC19_2: C19.2 FLT1.1 L1.2
NetC20_2: C20.2 L4.1 U4.41
NetD4_B: D4.B R1.2
NetD4_G: D4.G R2.2
NetD4_R: D4.R R3.2
NetD7_A: D7.A D27.K J5.2 | length 0.8
  Bottom Layer w0.406: D7.A 71.1,54.95 v1(71.1,54.2)
NetD8_A: D8.A | length 0.8
  Bottom Layer w0.406: D8.A 70.196,54.204 v1(70.2,54.2)
NetD17_A: D17.A M1.2 Q3.D
NetD18_K: D18.K J4.3 R31.1 U4.49
NetD19_K: D19.K J4.4 R33.1
NetD20_K: D20.K J4.5 R32.1 U4.46
NetD21_K: D21.K J4.6
NetD22_K: D22.K J4.7
NetD23_K: D23.K J4.8
NetD24_K: D24.K SW2.1
NetD25_K: D25.K SW3.1
NetFLT1_3: FLT1.3 L2.1
NetJ1_SH1: J1.SH1 J1.SH2 J1.SH3 J1.SH4
NetJ3_2: J3.2 R25.1
NetJ3_3: J3.3 R26.2
NetJ3_4: J3.4 R27.1
NetJ3_6: J3.6 R28.1
NetL3_1: L3.1 L4.2
NetL3_2: L3.2 U4.43
NetQ1_D: Q1.D R3.1
NetQ1_G: Q1.G R4.1 R15.2
NetQ2_D: Q2.D R2.1
NetQ2_G: Q2.G R13.1 R16.2
NetQ3_G: Q3.G R29.1 R30.1
NetQ4_D: Q4.D R1.1
NetQ4_G: Q4.G R14.1 R17.2
NetR4_2: R4.2
NetR6_2: R6.2 U1.13
NetR7_2: R7.2 U1.12
NetR8_2: R8.2 U1.5
NetR13_2: R13.2
NetR14_2: R14.2
NetR18_1: R18.1 U6.2
NetR19_1: R19.1 U6.3
NetR20_2: R20.2 U4.5 | length 2.7
  Top Layer w0.152: R20.2 66.049,67.007 66.049,66.318 66.027,66.296 66.027,66.106 66.049,66.084 66.049,65.389 65.697,65.037 U4.5
NetR21_1: R21.1 U7.2
NetR22_1: R22.1 U7.3
NetR23_1: R23.1 U2.1 U4.10 U5.6 | length 4.6
  Top Layer w0.152: U4.10@64.283,66.418 64.78,66.915 64.78,67.832 65.808,68.86 65.808,69.615 R23.1
NetR24_1: R24.1 U2.2 U4.9 U5.4 | length 4.4
  Top Layer w0.152: U4.9 65.085,66.653 65.085,67.532 66.974,69.422 R24.1
NetR29_2: R29.2
NetR33_2: R33.2 U4.47
NetSW1_1: SW1.1 U1.1 U1.20
NetU1_6: U1.6
NetU1_7: U1.7
NetU1_8: U1.8
NetU1_9: U1.9
NetU1_17: U1.17
NetU5_11: U5.11
nRST: D13.K R26.1 U4.8 | length 0.9
  Top Layer w0.152: U4.8 64.882,65.851 65.418,66.387 v1(65.527,66.387)
PROG2_IN: D7.K D8.K R5.2 U1.4
SWD_CLK: D15.K R27.2 U4.56
SWD_IO: D16.K R25.2 U4.54 | length 4
  Top Layer w0.152: U4.54 63.374,58.346 63.374,58.079 64.379,57.074 64.58,57.074 65.071,56.583 65.739,56.583 R25.2
SWO: D14.K R28.2 U4.63
USB_D_N: D2.K J1.2 U4.52 | length 17.7
  Top Layer w0.203: U4.52@62.566,58.02 62.566,57.861 62.587,57.841
  Top Layer w0.271: 62.587,57.841 62.587,57.753 64.053,56.287 64.254,56.287 70.8,49.741 70.8,47.402 71.255,46.946 72.092,46.946 72.25,46.788 72.25,46.779 72.394,46.635 D2.K 72.564,46.703 73.882,46.703 J1.2
USB_D_P: D1.K J1.3 U4.53 | length 17.7
  Top Layer w0.203: U4.53 63.01,58.144 63.01,58.011
  Top Layer w0.271: 63.01,58.011 63.01,57.928 64.228,56.71 64.429,56.71 71.223,49.916 71.223,47.577 71.43,47.37 72.096,47.37 72.254,47.528 72.254,47.537 72.398,47.681 D1.K ; D1.K@72.607,47.788 72.912,47.483 73.882,47.483 J1.3
VBACK_IN: BATT1.P C17.2 U4.1 | length 1.4
  Top Layer w0.152: U4.1 67.2,63.5 67.7,63.5 C17.2
VBATT_SENSE: C3.2 J2.1 U1.14 U1.15 U1.16
VCC: D4.+
VDD: C7.2 C8.2 C9.2 C10.2 C11.2 C12.2 C13.2 C14.2 C15.2 C16.2 C25.2 D12.K D17.K J3.1 J4.1 M1.1 R10.2 R11.2 R18.2 R19.2 R21.2 R22.2 R23.2 R24.2 R31.2 R32.2 U3.1 U3.2 U4.13 U4.14 U4.30 U4.33 U4.44 U4.45 U4.55 U4.68 U5.1 U5.8 U5.14 | length 6.3
  Top Layer w0.152: C15.2 55.847,64.583 56.213,64.583 56.29,64.507 56.546,64.507 56.634,64.42 56.701,64.42 56.966,64.154 U4.33 ; C9.2 57.521,66.071 57.521,65.671 57.496,65.646 57.496,65.456 57.583,65.369 57.583,65.268 U4.30 ; U4.68 U4.68@67.055,62.584
  Top Layer w0.203: U4.55 63.151,59.132 63.946,58.337 C14.2
  Top Layer w0.254: C11.2 C8.2 67.31,62.59 67.1,62.59 U4.68@67.094,62.584
pads on no net: ANT1.2 J1.4 J2.P1 J2.P2 J3.7 J3.8 J3.9 J3.10 J3.11 J3.12 J3.13 J5.3 J5.9 SW1.3 SW1.H U2.4 U2.9 U2.11 U3.5 U4.2 U4.6 U4.7 U4.11 U4.12 U4.15 U4.16 U4.17 U4.18 U4.19 U4.20 U4.21 U4.22 U4.23 U4.24 U4.25 U4.26 U4.27 U4.28 U4.29 U4.36 U4.37 U4.38 U4.39 U4.40 U4.48 U4.50 U4.51 U4.57 U4.58 U4.59 U4.60 U4.61 U4.62 U4.64 U4.65 U4.66 U4.67 U5.2 U5.3 U5.7 U5.9 U5.13 U5.15 U5.16 X1.FLOAT

## Other copper
Top Layer:
  pour cut-out: 56.47,70.457 56.514,70.414 56.557,70.37 56.602,70.261 56.602,70.229 56.614,70.2 56.614,66.116 57.022,65.708 57.034,65.678 57.057,65.656 57.089,65.577 57.756,64.911 57.768,64.881 57.79,64.859 57.823,64.781 57.823,64.659 57.79,64.581 57.704,64.495 57.626,64.463 57.504,64.463 57.427,64.495 57.404,64.517 57.375,64.53 56.708,65.196 56.63,65.229 56.607,65.251 56.578,65.263 56.078,65.763 56.066,65.793 56.043,65.815 55.998,65.924 55.998,65.956 55.986,65.985 55.986,70.2 55.998,70.229 55.998,70.261 56.043,70.37 56.086,70.414 56.13,70.457 56.239,70.502 56.361,70.502

## Silkscreen, mask and mechanical layers (free items; w line width, h text height)
TFT:
  circle w0.3: c57.5,66.5 r1.75
  circle w0.3: c71.5,66.5 r1.75
  circle w0.3: c71.5,32.5 r1.75
  circle w0.3: c57.5,32.5 r1.75
  lines w0.635: 54,29 75,29 75,70 54,70 54,29 ; 54,43.5 54,57.5 55.875,57.5 57.625,57.5 59.5,57.5 59.5,43.5 54,43.5
Battery:
  lines w0.635: 23,34.5 40,34.5 40,72.5 23,72.5 23,34.5